# Altium PCB Switch.PcbDoc
Units mil, origin at the board's own origin, x right, y up, seen from the top; angles counter-clockwise.
Board outline 2390 x 2435 mil, 2 copper layers (Top Layer, Bottom Layer); 52 components, 35 nets, 139 pads, 12 vias.
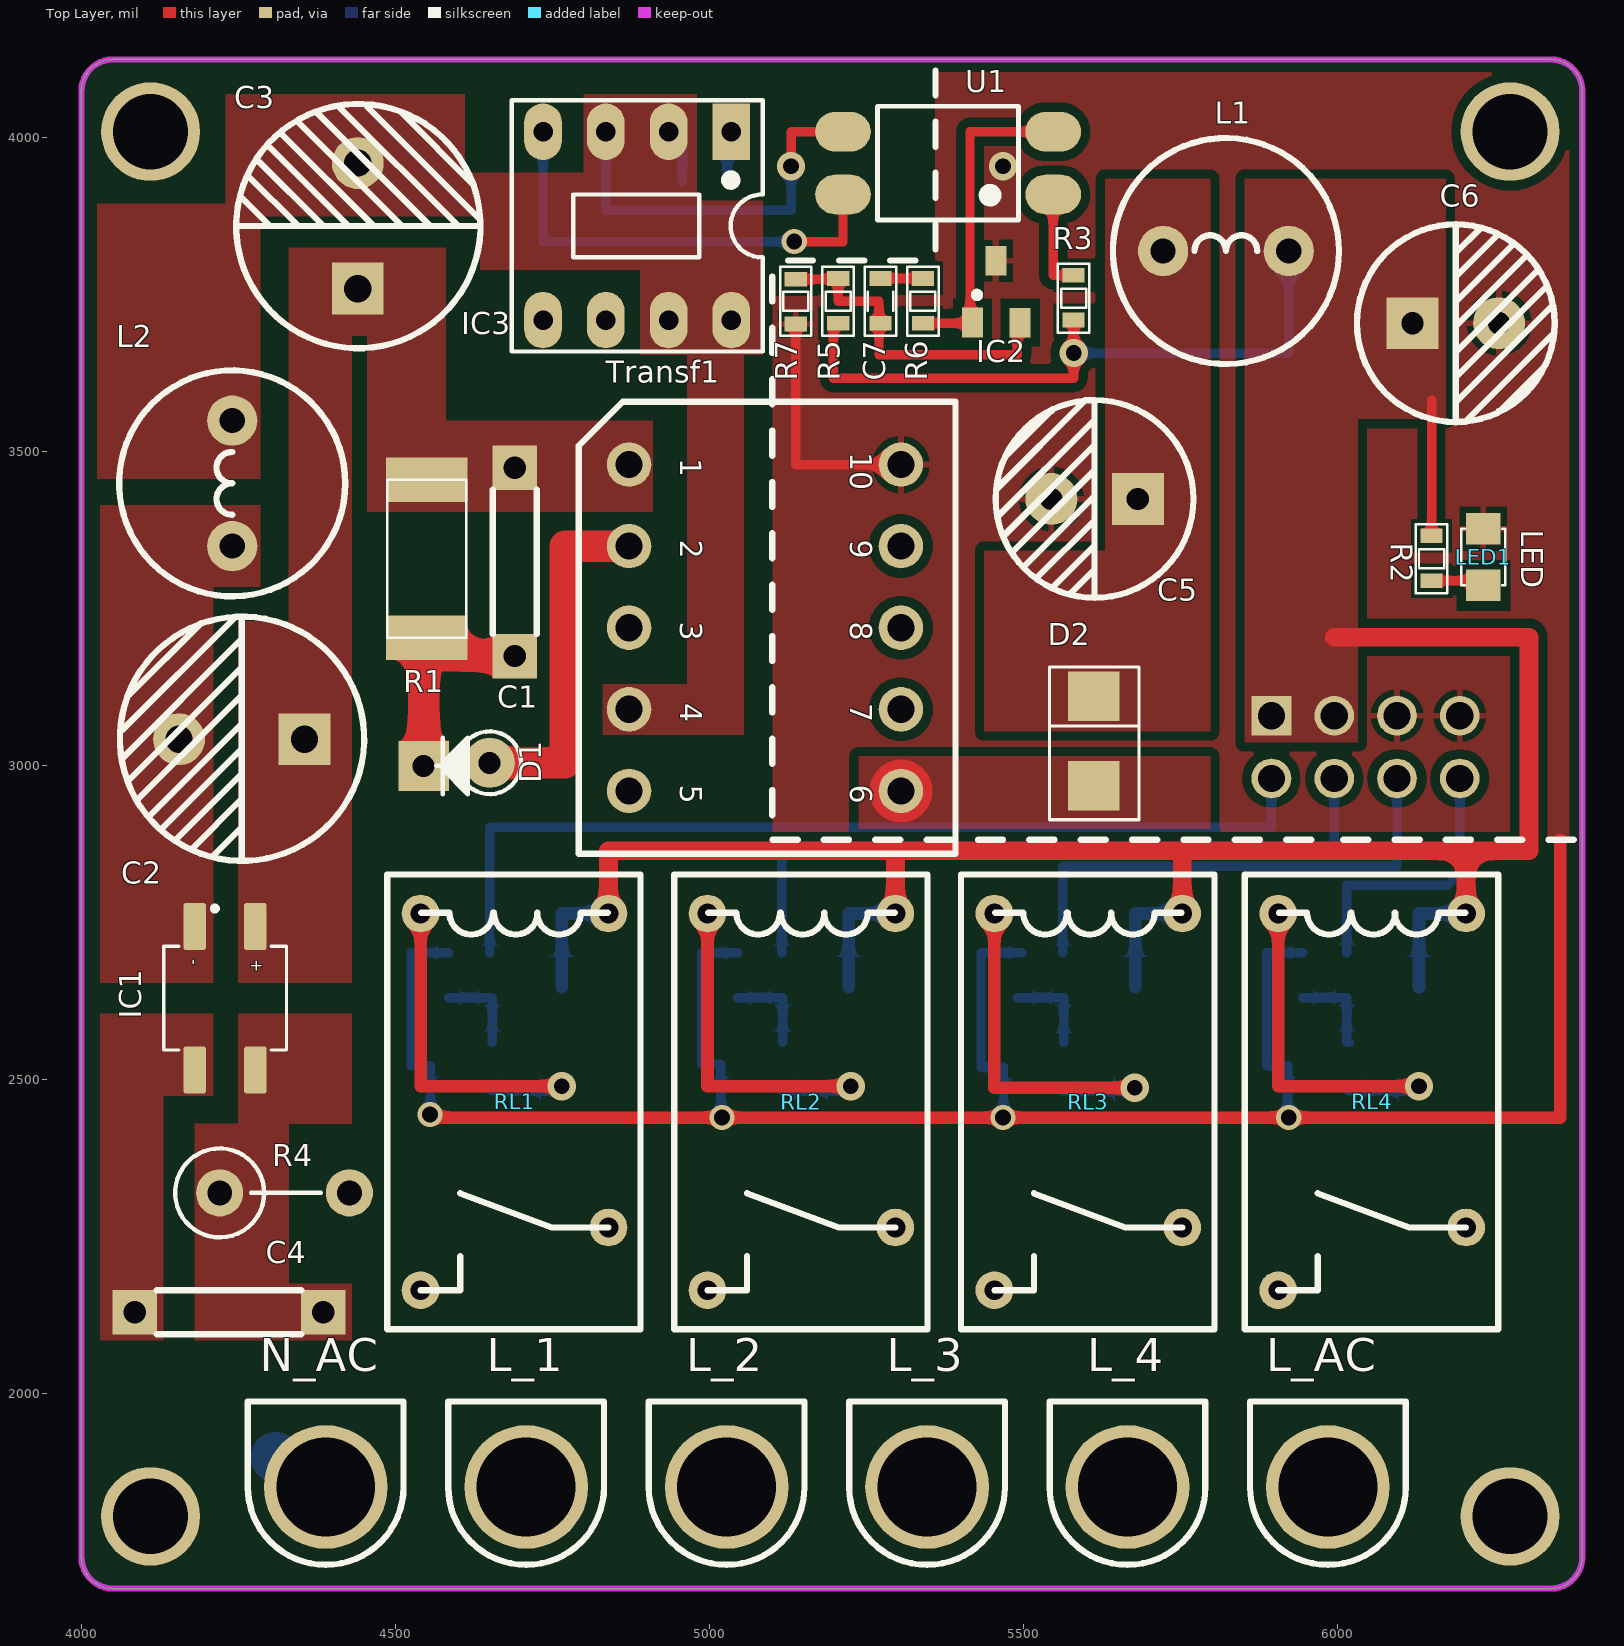
[diagram p0: Top Layer view]
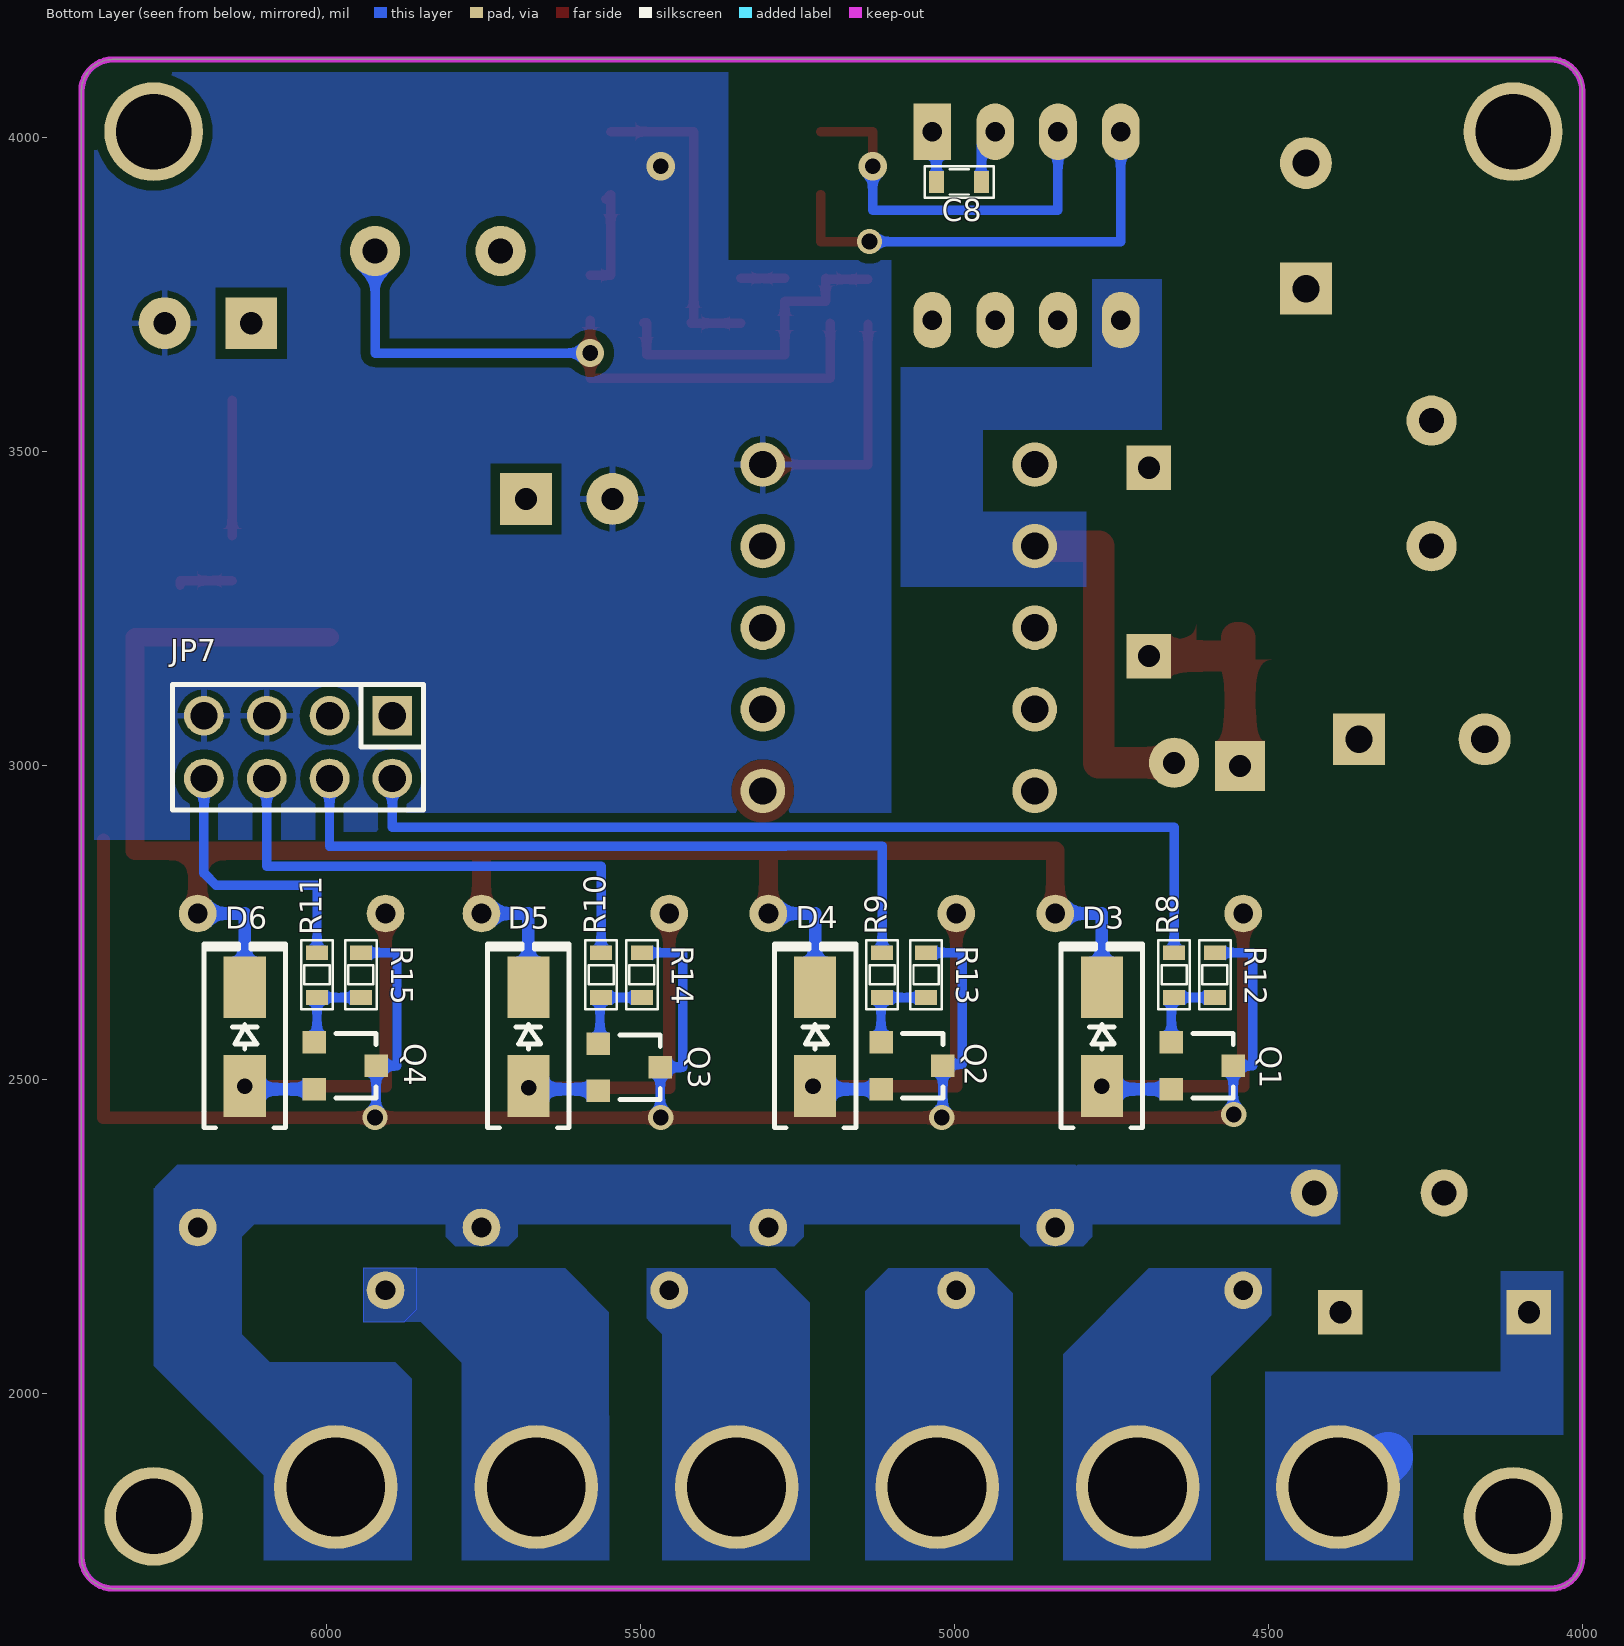
[diagram p1: Bottom Layer view, seen from below]
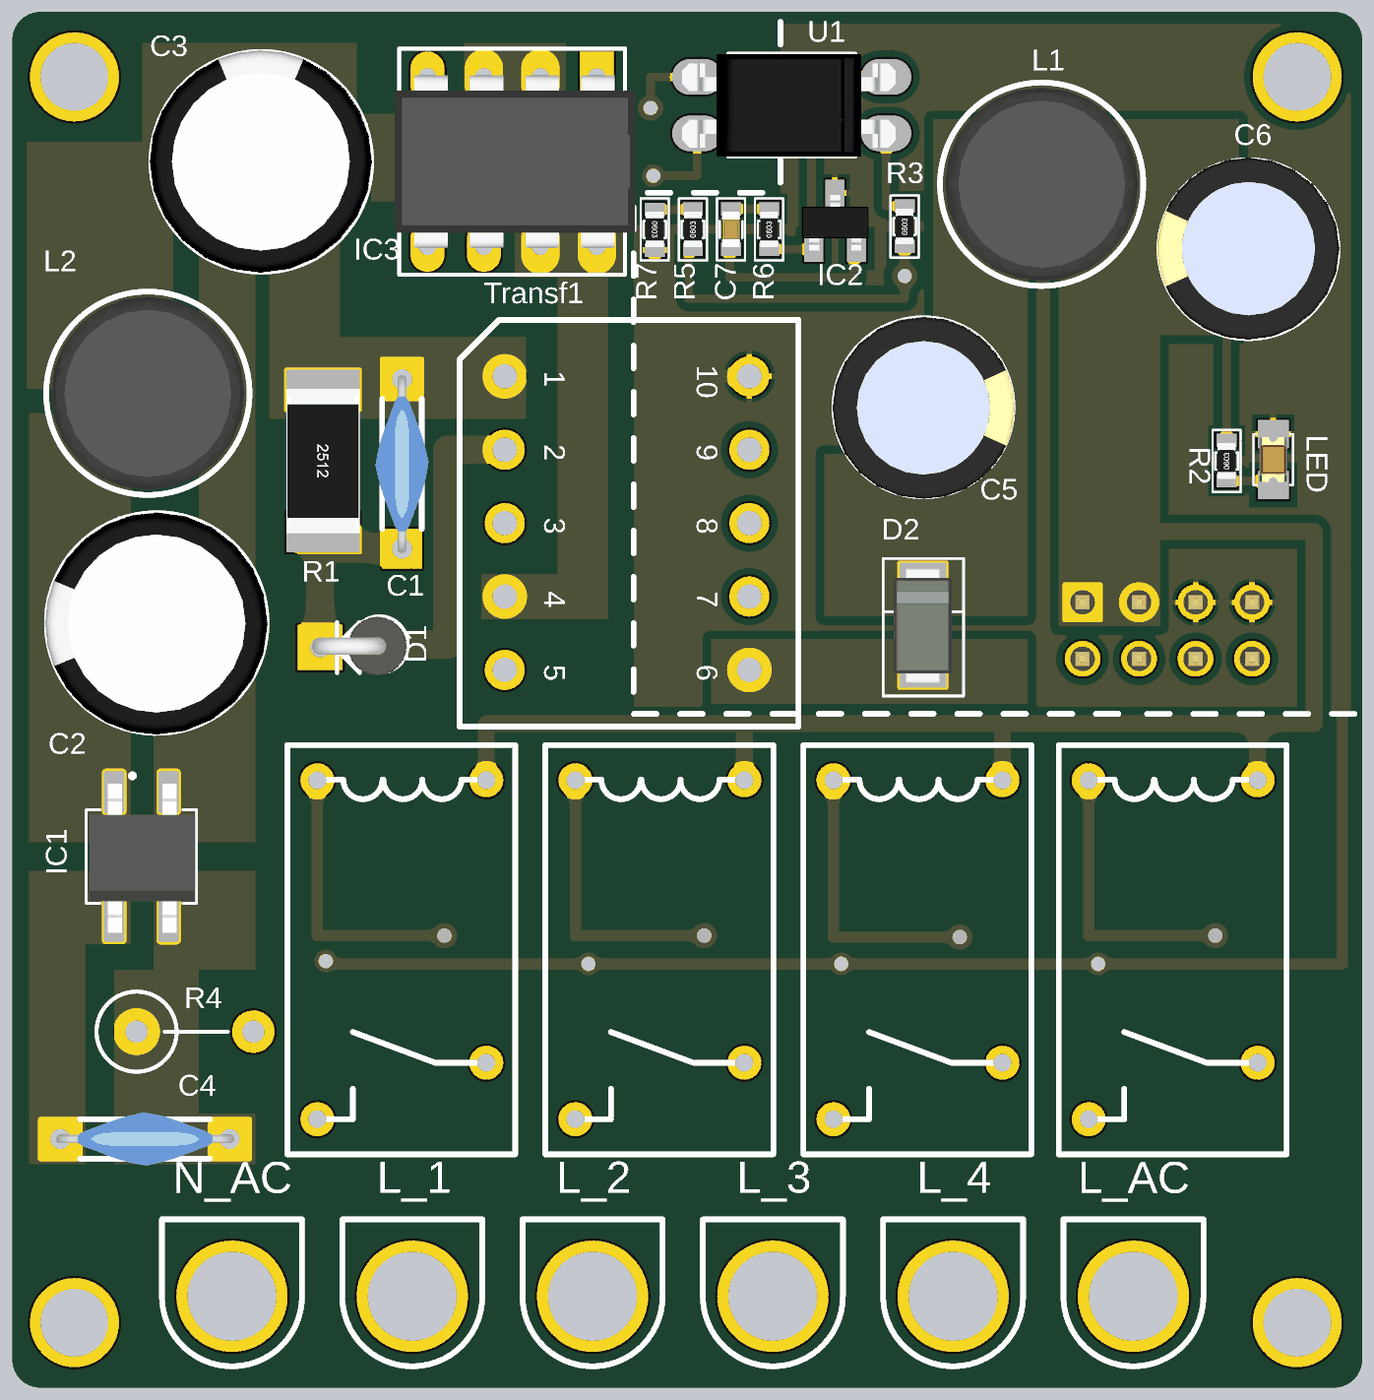
[diagram p2: 3D render of the assembled board from above, using the file's embedded part models]
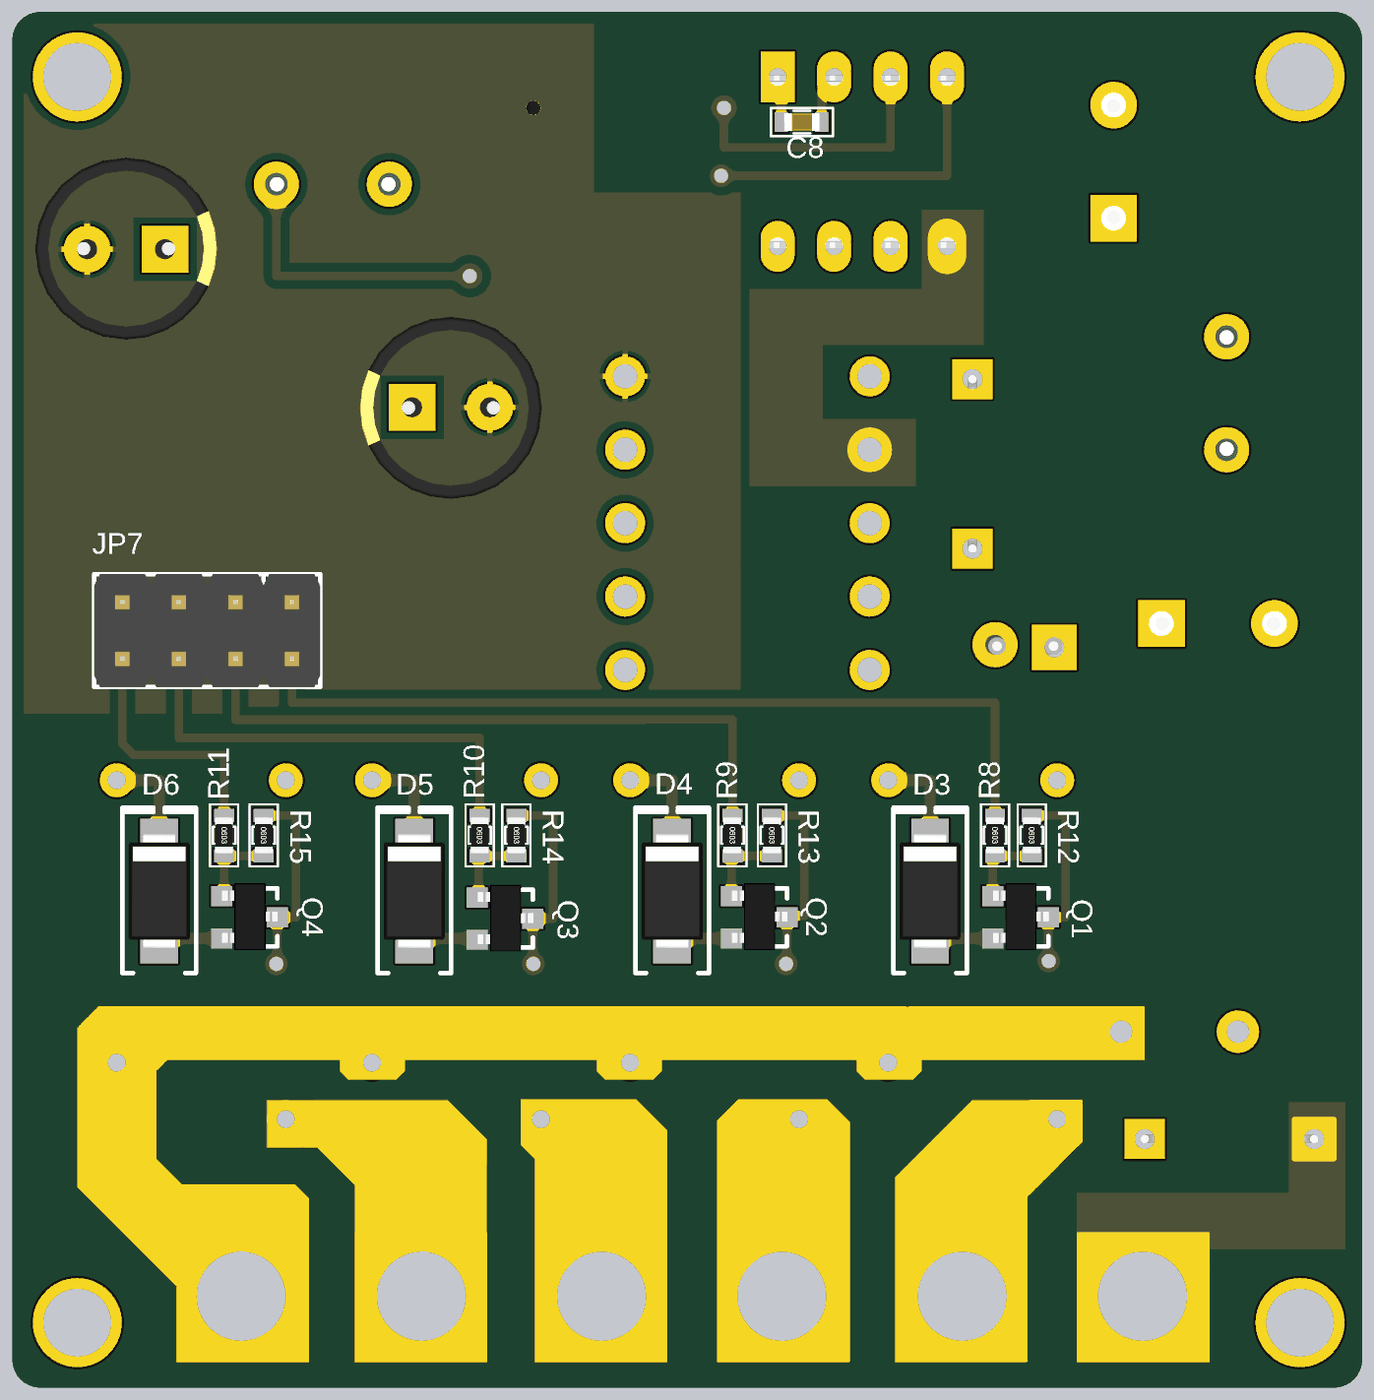
[diagram p3: 3D render of the assembled board from below, using the file's embedded part models]

## Layer stack, top to bottom
Top Solder: solder mask 0.4, Solder Resist, Dk 3.5
Top Layer: signal copper 1.4
Dielectric 1: dielectric 12.6, FR-4, Dk 4.8
Bottom Layer: signal copper 1.4
Bottom Solder: solder mask 0.4, Solder Resist, Dk 3.5

## Board outline
4000,1740 4000,4075 cw(c4050,4075) 4050,4125 6340,4125 cw(c6340,4075) 6390,4075 6390,1740 cw(c6340,1740) 6340,1690 4050,1690 cw(c4050,1740)

## Design rules (kind name [scope] priority, off if disabled: settings)
Clearance Clearance_1 [InNet('GND')] p1: gap=15 ignorepadtopadclearanceinfootprint=FALSE
Clearance AC_Clearance [InNetClass('AC')] p2: gap=20 ignorepadtopadclearanceinfootprint=FALSE
Clearance [All] p3: gap=15 ignorepadtopadclearanceinfootprint=FALSE
PolygonConnect AC_Polygon [InNetClass('AC')] p1: connectstyle=Direct reliefconductorwidth=10 reliefentries=4 polygonreliefangle="90 Angle" airgapwidth=10
PolygonConnect GND_Polaygon [InNet('GND')] p2: thpad.connectstyle=Relief thpad.reliefconductorwidth=10 thpad.reliefentries=4 thpad.polygonreliefangle="90 Angle" thpad.airgapwidth=10 smdpad.connectstyle=Relief smdpad.reliefconductorwidth=10 smdpad.reliefentries=4 smdpad.polygonreliefangle="90 Angle" smdpad.airgapwidth=10 via.connectstyle=Direct via.reliefconductorwidth=10 via.reliefentries=4 via.polygonreliefangle="90 Angle" via.airgapwidth=10
PolygonConnect [All] p3: thpad.connectstyle=Relief thpad.reliefconductorwidth=10 thpad.reliefentries=4 thpad.polygonreliefangle="90 Angle" thpad.airgapwidth=10 smdpad.connectstyle=Relief smdpad.reliefconductorwidth=10 smdpad.reliefentries=4 smdpad.polygonreliefangle="90 Angle" smdpad.airgapwidth=10 via.connectstyle=Direct via.reliefconductorwidth=10 via.reliefentries=4 via.polygonreliefangle="90 Angle" via.airgapwidth=10
RoutingVias [All] p1: holewidth=28 width=50 viastyle="Through Hole" minholewidth=15 minwidth=15 maxholewidth=100 maxwidth=100
SilkToSilkClearance [All] p1: silktosilkclearance=0
SilkToSolderMaskClearance [IsPad] p1: minsilkscreentomaskgap=0 clearancetoexposedcopper=TRUE
SolderMaskExpansion [All] p1: expansion=4 istentingtop=FALSE
UnRoutedNet [All] p1: checkbadconnections=TRUE
Width [All] p1: maxlimit=200 minlimit=10 preferedwidth=10
27 further rules are at their usual default settings.

## Classes and differential pairs
net class AC: L_1 L_2 L_3 L_4 L_AC N_AC

## Components (designator, comment, footprint, x,y, rotation, side; value= is the part's Value field where it differs from the comment)
C1 "1nF/400V" 103/2KV 4690,3475 r270 top
C2 "10uF/400V" C10mm 4255,3040 r180 top
C3 "10uF/400V" C10mm 4437.56,3860.35 r90 top
C4 "20D471K" 103/2KV 4085,2130 r0 top
C5 "470uF/25V" C8mm 5620,3422.5 r180 top
C6 "470uF/25V" C8mm 6181.96,3707.7 r0 top
C7 "100nF" CAP_0603 5272.5,3738.03 r90 top value=33p
C8 "100nF" CAP_0603 4990,3930 r0 bottom value=33p
D1 "1N4937" DIO-1AN 4595,3000 r0 top value=1N5007
D2 "SS14" DO-214AC(SMA) 5615,3017.5 r270 top value=1N5007
D3 "M7" "DIODE SMA" 4765,2568.76 r90 bottom
D4 "M7" "DIODE SMA" 5221.67,2568.76 r90 bottom
D5 "M7" "DIODE SMA" 5678.33,2568.76 r90 bottom
D6 "M7" "DIODE SMA" 6130,2568.76 r90 bottom
IC1 "MB6S" MB6S 4240,2635 r270 top
IC2 "TL431" TL431_SOT 5460,3765 r0 top
IC3 "TNY264" DIP8 4890,3860 r180 top
JP7 "JP 2x4 2.54" "JP 2x4 DT" 6045,3030 r0 bottom
L1 "22uH" Inductor 5822.5,3820 r0 top value="150 mH"
L2 "L-DIP-1" Inductor 4240,3450 r90 top value="150 mH"
L_1 "Coc_dong" Coc_dong 4704.21,1850 r180 top (schematic designator JP1)
L_2 "Coc_dong" Coc_dong 5023.43,1850 r180 top (schematic designator JP4)
L_3 "Coc_dong" Coc_dong 5342.64,1850 r180 top (schematic designator JP5)
L_4 "Coc_dong" Coc_dong 5661.85,1850 r180 top (schematic designator JP6)
L_AC "Coc_dong" Coc_dong 5981.06,1850 r180 top (schematic designator JP2)
LED1 "LED" LED-0805-Red 6232.5,3287.5 r90 top value="LED 3 ly Single Colour"
N_AC "Coc_dong" Coc_dong 4385,1850 r180 top (schematic designator JP3)
Q1 "2N2222" SOT23 4605,2522.5 r270 bottom value=C9014
Q2 "2N2222" SOT23 5067.5,2522.5 r270 bottom value=C9014
Q3 "2N2222" SOT23 5517.5,2520 r270 bottom value=C9014
Q4 "2N2222" SOT23 5970,2522.5 r270 bottom value=C9014
R1 "82k" RES-SMD-2512 4545,3330 r270 top
R2 "3.3k" RES-SMD-0603 6150,3330 r90 top
R3 "500R" RES-SMD-0603 5580,3745 r90 top
R4 "2R/2W" RES-1WW 4285,2320 r0 top
R5 "10k" RES-SMD-0603 5205,3740 r90 top
R6 "3.3k" RES-SMD-0603 5340,3740 r90 top
R7 "2.7k" RES-SMD-0603 5137.5,3740 r270 top
R8 "1k" RES-SMD-0603 4650,2667.5 r270 bottom
R9 "1k" RES-SMD-0603 5115,2667.5 r270 bottom
R10 "1k" RES-SMD-0603 5562.5,2667.5 r270 bottom
R11 "1k" RES-SMD-0603 6015,2667.5 r270 bottom
R12 "10k" RES-SMD-0603 4585,2667.5 r270 bottom
R13 "10k" RES-SMD-0603 5045,2667.5 r270 bottom
R14 "10k" RES-SMD-0603 5497.5,2667.5 r270 bottom
R15 "10k" RES-SMD-0603 5945,2667.5 r270 bottom
RL1 "Relay_HF32" HF32F 4890.39,2827.2 r270 top
RL2 "Relay_HF32" HF32F 5347.32,2827.2 r270 top
RL3 "Relay_HF32" HF32F 5804.25,2827.2 r270 top
RL4 "Relay_HF32" HF32F 6256.18,2827.2 r270 top
Transf1 "Transformer EE16" "Transformer SW" 4871.93,3479.92 r270 top
U1 "OPTO PC817 SMD" SOP4 5380,3960 r180 top value=PC817

## Footprints (in the part's own frame and the unit in brackets; to place one, negate y for a bottom-side part, rotate by r counter-clockwise, add the part's x,y. Pads: shape width x height; smd on the part's side, far side on the other; paste and mask are expansions set on the pad)
103/2KV [mm]
  rect 1.8x1.8 hole 0.9: 1(0,0) 2(7.62,0)
  silkscreen extent 0.89,-0.89 6.73,0.89, body extent -0.19,-1.2 7.81,1.19, height 9.03
C8mm [mm]
  rect 2.1x2.1 hole 0.9: 1(-1.581,-0.069)
  round 2.1 hole 0.9: 2(1.919,-0.069)
  silkscreen extent -3.83,-4.07 4.17,3.93, body extent -3.93,-4.14 4.27,4.06, height 13.81
C10mm [mm]
  rect 2.1x2.1 hole 1.1: 1(-2.549,-0.062)
  round 2.1 hole 1.1: 2(2.531,-0.062)
  silkscreen extent -4.96,-5.02 4.92,4.85, body extent -5.01,-5.06 4.96,4.94, height 20.01
CAP_0603 [mm]
  rect 0.6x0.9 smd: 1(-0.839,0) 2(0.977,0)
  silkscreen extent -1.35,-0.64 1.45,0.64, body extent -0.75,-0.4 0.85,0.4, height 0.9
Coc_dong [mm]
  round 5 hole 4: 1(-0.1,-0.042)
  silkscreen extent -3.25,-3.5 3.05,3.11
DIO-1AN [mil] "Diode 1A, W 100mil, L 150mil"
  round 80 hole 35: 1(55,5)
  rect 80x80 hole 35: 2(-50,0)
  silkscreen extent -30,-45 105,55, body extent -64,-50 104,55, height 252
"DIODE SMA" [mm] "SMA"
  rect 2.5x1.7 smd: 1(-2,0) 2(2,0)
  silkscreen extent -3.68,-1.65 3.75,1.65, body extent -2.6,-1.37 2.6,1.37, height 2.4
DIP8 [mil] "DIP, 8-Leads, Row Spacing 7.62mm, Pitch 2.54mm, Body 9.91x6.73mm"
  rect 60x90 hole 31: 1(-145,-150)
  oval 60x90 hole 31: 2(-45,-150) 3(55,-150) 4(155,-150) 5(155,150) 6(55,150) 7(-45,150) 8(-145,150)
  silkscreen extent -195,-200 205,200, body extent -213,-153 213,153, height 177
DO-214AC(SMA) [mm] "DO-214AC Diode Smallest Size"
  rect 2x2.1 smd: 1(1.245,-0.076) 2(-2.367,-0.076)
  silkscreen extent -3.56,-1.86 2.62,1.76, body extent -3.13,-1.38 2.07,1.22, height 2.4
HF32F [mm]
  round 1.524 hole 0.8: 1(16.82,-8.9) 2(14.28,-1.3) 4(1.58,-8.9) 5(1.58,-1.3)
  silkscreen extent 0,-10.25 18.4,0
Inductor [mil]
  round 80 hole 40: 1(-100,0) 2(100,0)
  silkscreen extent -180,-180 180,180, body extent -171,-171 171,171, height 394
"JP 2x4 DT" [mm]
  rect 1.61x1.6 hole 1.1: 1(-3.81,-1.27)
  oval 1.61x1.6 hole 1.1: 2(-1.27,-1.27) 3(1.27,-1.27) 4(3.81,-1.27) 5(3.81,1.27) 6(1.27,1.27) 7(-1.27,1.27) 8(-3.81,1.27)
  silkscreen extent -5.08,-2.54 5.08,2.54, body extent -5.08,-2.54 5.08,2.54, height 8.55
LED-0805-Red [mil]
  rect 50x55 smd: 1(0,0) 2(90,0)
  silkscreen extent 0,-35 90,35, body extent 5,-25 85,25, height 43
MB6S [mm]
  rrect23% 1.91x0.91 smd: 1(-2.774,0.935) 2(-2.774,-1.515) 3(3.026,-1.515) 4(3.026,0.935)
  silkscreen extent -3.6,-2.77 2.23,2.19, body extent -3.15,-2.61 3.55,2.11, height 2.7
RES-1WW [mm]
  round 1.905 hole 1: 1(-1.651,0) 2(3.6,0)
  silkscreen extent -3.45,-1.8 2.45,1.8
RES-SMD-0603 [mm]
  rect 0.6x0.9 smd: 1(-0.889,0) 2(0.927,0)
  silkscreen extent -1.4,-0.64 1.4,0.63, body extent -0.8,-0.4 0.8,0.4, height 0.43
RES-SMD-2512 [mm] "Chip Capacitor, Body 3.2x2.5mm, IPC Medium Density"
  rect 1.8x3.3 smd: 1(-3.2,0.127) 2(3.2,0.127)
  silkscreen extent -3.2,-1.47 3.2,1.73, body extent -3.2,-1.47 3.2,1.73, height 0.6
SOP4 [mm]
  oval 2.25x1.6 smd: 1(-4.25,1.27) 2(-4.25,-1.27) 3(4.25,-1.27) 4(4.25,1.27)
  silkscreen extent -2.85,-2.3 2.85,2.3, body extent -4.67,-2.29 4.93,2.31, height 3.6
SOT23 [mm] "SOT23"
  rect 0.9x0.95 smd: 1(-0.95,-1.25) 2(0,1.25)
  rect 0.9x0.95 smd mask+0: 3(0.95,-1.25)
  silkscreen extent -1.3,-0.38 1.3,1.25, body extent -1.52,-1.23 1.48,1.27, height 1.06
TL431_SOT [mm]
  rect 0.85x1.2 smd: 1(0.885,-1.5) 2(-0.095,1) 3(-1.04,-1.495)
  silkscreen extent -0.98,-0.5 -0.73,-0.25, body extent -1.57,-1.58 1.43,0.92, height 1.06
"Transformer SW" [mm] "Transformer; 4 Leads"
  round 1.8 hole 1.1: 1(0,0) 2(3.3,0) 3(6.6,0) 4(9.9,0) 5(13.2,0) 6(13.2,11) 7(9.9,11) 8(6.6,11) 9(3.3,11) 10(0,11)
  silkscreen extent -2.54,-2.03 15.75,13.21

## Part data
C1: library part Cap2KV, "CAP CERAMIC", LatestRevisionDate=17-Jul-2002, LatestRevisionNote="Re-released for DXP Platform.", PackageReference=RAD-0.3, Published=8-Jun-2000, Publisher="Altium Limited"
C2 C3: library part "Cap Pol", "Polarized Capacitor (Axial)", LatestRevisionDate=17-Jul-2002, LatestRevisionNote="Re-released for DXP Platform.", PackageReference=POLAR0.8, Published=8-Jun-2000, Publisher="Altium Limited"
C4: library part Cap2KV, "Varistor", LatestRevisionDate=17-Jul-2002, LatestRevisionNote="Re-released for DXP Platform.", PackageReference=RAD-0.3, Published=8-Jun-2000, Publisher="Altium Limited"
C5 C6: library part "Cap Pol", "470uF 25V 8x12mm", LatestRevisionDate=17-Jul-2002, LatestRevisionNote="Re-released for DXP Platform.", PackageReference=POLAR0.8, Published=8-Jun-2000, Publisher="Altium Limited"
C7 C8: library part CapSMD, "Capacitor", LatestRevisionDate=17-Jul-2002, LatestRevisionNote="Re-released for DXP Platform.", PackageReference=RAD-0.3, Published=8-Jun-2000, Publisher="Altium Limited"
D1: library part "Diode SMD", "Diode Schottky / 1N4937", Code - JEDEC=DO-214-AB, Published=8-Jun-2000, Publisher="Altium Limited", Revision="July-2002: Re-released for DXP Platform."
D2: library part "Diode SMD", "SS34 Diode Schottky 3A 40V SMA(DO-214AC)", Code - JEDEC=DO-214-AB, Published=8-Jun-2000, Publisher="Altium Limited", Revision="July-2002: Re-released for DXP Platform."
D3 D4 D5 D6: library part "Diode M7 ( 4007 )", "Dán", Chung_Loai=Dán, Don_Vi=Con, Ma_Hang=MH000944, Ten_Linh_Kien="Diode M7 1N4007 SMD 1A 1000V"
IC2: "Programmable Shunt Regulator"
IC3: "Enhanced, Energy Efficient, Low Power Off-line Switcher"
JP7: library part "JP 2x4 2.54 Duc Thang", "Cắm", Chung_Loai=Cắm, Don_Vi=Con, Ma_Hang=MH002686, Ten_Linh_Kien="Jump Đôi Đực 2.54MM 2x40P Thẳng 11MM"
L1: library part Inductor, "CD73R 22uH 1.23A 7345"
L2: "Inductor"
LED1: "LED Single colour Green and Red"
Q1 Q2 Q3 Q4: library part "C1815 HF SMD", "NPN transistor"
R1 R2 R3 R4 R5 R6 R7 R8 R9 R10 R11 R12 R13 R14 R15: library part "Resistor - SMD", "Resistor", Manufacturer="Generic Components", Class=Passive, Published=08/06/2000, Publisher="Altium Hobart Technology Centre"
Transf1: library part "Tranformer EE16"
U1: "Single Opto"

## Free pads (board coordinates)
  round 157.48 hole 120: 0(4110,1805) 0(4110,4010) 0(6275,1805) 0(6275,4010)

## Via types
v1: diameter 45, hole 25, Top Layer to Bottom Layer, tented both sides, 7 vias
v2: diameter 40, hole 25, Top Layer to Bottom Layer, tented both sides, 5 vias

## Nets (pads, with @x,y where several pads share a name; then routed paths per layer and width w, separated by ;. In a path a pad name is that pad's centre, name@x,y a point inside that pad or via, vN(x,y) a via of type N, cw(c..) or ccw(c..) an arc to the next point about the centre after c; other vN are vias at no path point)
+12: C6.1 D3.2 D4.2 D5.2 D6.2 JP7.1 JP7.2 L1.2 R2.2 R3.1 R5.1 RL1.5 RL2.5 RL3.5 RL4.5 | length 4567.7
  Top Layer w15: R5.1@5197.5,3705 5197.5,3617.5 5580,3617.5 v1(5580,3657.5) R3.1 ; R2.2 6150,3582.5
  Top Layer w20: 5295.86,2865 5296.14,2865 ; 5752.5,2865 5753.07,2865
  Top Layer w30: RL1.5 4839.21,2865 5295.86,2865 ; RL2.5 5296.14,2865 5752.5,2865 ; RL3.5 5753.07,2865 6205,2865 ; 5995,3205 6305,3205 6305,2865 6205,2865 ; RL4.5 6205,2865
  Bottom Layer w15: v1(5580,3657.5) 5922.5,3657.5 L1.2
  Bottom Layer w20: D3.2 4765,2765 RL1.5 ; D4.2 5221.67,2765 RL2.5 ; D5.2 5678.33,2765 RL3.5 ; D6.2 6130,2765 RL4.5
GND: C5.2 C6.2 IC2.2 JP7.3 JP7.4 LED1.2 Q1.2 Q2.2 Q3.2 Q4.2 R7.2 R12.1 R13.1 R14.1 R15.1 Transf1.10 | length 4065.5
  Top Layer w15: R7.2 5137.5,3479.92 Transf1.10 ; v1@5466.74,3955.54 5467.5,3955.54 v1(5467.5,3955)
  Top Layer w20: v2(4555,2445) 4555,2440 v2(5020,2440) v2(5467.5,2440) v2(5922.5,2440) 6355,2440 6355,2882.5 ; JP7.4@6205,3080 JP7.4@6205,3085
  Bottom Layer w15: v2(4555,2445) 4555.79,2445 Q1.2 4525,2522.5 4525,2702.5 R12.1 ; v2(5020,2440) 5018.29,2440 Q2.2 5018.29,2525 4987.5,2525 4987.5,2702.5 R13.1 ; v2(5467.5,2440) 5468.29,2440 Q3.2 5432.5,2520 5432.5,2702.5 R14.1 ; v2(5922.5,2440) 5920.79,2440 Q4.2 5887.5,2522.5 5887.5,2702.5 R15.1
GND_IN: C3.2 C8.1 IC3.2 IC3.3 IC3.7 IC3.8 L2.2 Transf1.4 U1.3 | length 716.8
  Top Layer w15: v1(5130,3955) 5130,4010 U1.3
  Bottom Layer w15: IC3.3 4835,3885 5130,3885 v1(5130,3955) ; IC3.2 4956.97,3988.03 C8.1
L_1: L_1.1 RL1.1
L_2: L_2.1 RL2.1
L_3: L_3.1 RL3.1
L_4: L_4.1 RL4.1
L_AC: L_AC.1 R4.2 RL1.2 RL2.2 RL3.2 RL4.2
N_AC: C4.1 IC1.3 N_AC.1 | length 102.8
  Bottom Layer w80: N_AC.1@4309.37,1899.6 4334.96,1874.01 N_AC.1@4401.58,1874.01
NetC1_1: C1.1 C2.1 C3.1 IC1.1 R1.1 Transf1.1
NetC1_2: C1.2 D1.2 R1.2 | length 378
  Top Layer w50: D1.2 4545,3204.01 R1.2 4550,3175 C1.2
NetC2_2: C2.2 IC1.2 L2.1
NetC4_2: C4.2 IC1.4 R4.1
NetC5_1: C5.1 D2.2 L1.1
NetC7_1: C7.1 IC2.1 R5.2 R7.1 | length 529.8
  Top Layer w15: R7.1 R5.2@5205,3775 ; R5.2 R5.2@5205,3775 ; IC2.1 5490,3705.94 5490,3655 5270,3655 5270,3740 5205,3740 R5.2@5205,3775
NetC7_2: C7.2 R6.2 | length 70
  Top Layer w15: C7.2@5270,3776.49 R6.2
NetC8_2: C8.2 IC3.1 | length 82.7
  Bottom Layer w15: C8.2 5028.46,4003.46 IC3.1
NetD1_1: D1.1 IC3.5 Transf1.2 | length 566.9
  Top Layer w50: D1.1 4770,3005 4770,3350 Transf1.2
NetD2_1: D2.1 Transf1.6 | length 0.3
  Top Layer w100: Transf1.6 Transf1.6@5305.24,2960
NetD3_1: D3.1 Q1.3 RL1.4 | length 620.7
  Top Layer w20: RL1.4 4540,2490 v1(4765,2490) v1@4765,2487.5
  Bottom Layer w20: RL1.4 RL1.4@4542.5,2765 ; Q1.3 4765,2485.1 v1(4765,2490)
NetD4_1: D4.1 Q2.3 RL2.4 | length 616.3
  Top Layer w20: RL2.4 4996.93,2490 v1(5225,2490)
  Bottom Layer w20: Q2.3 5225,2485.1 v1(5225,2490)
NetD5_1: D5.1 Q3.3 RL3.4 | length 616.8
  Top Layer w20: RL3.4 5453.86,2487.5 v1(5677.5,2487.5)
  Bottom Layer w20: Q3.3@5564.21,2485.1 5677.5,2485.1 v1(5677.5,2487.5)
NetD6_1: D6.1 Q4.3 RL4.4 | length 614.9
  Top Layer w20: RL4.4 5905.79,2490 v1(6130,2490)
  Bottom Layer w20: Q4.3 6130,2485.1 v1(6130,2490)
NetIC2_3: IC2.3 R6.1 U1.2 | length 520.5
  Top Layer w15: R6.1 5419.06,3705 IC2.3 5415,3706.16 5415,4010 U1.2
NetIC3_4: IC3.4 U1.4 | length 727.7
  Top Layer w15: v2(5135,3835) 5212.68,3835 U1.4
  Bottom Layer w15: IC3.4 4735,3835 v2(5135,3835)
NetLED1_1: LED1.1 R2.1 | length 90
  Top Layer w15: R2.1 6232.5,3295 LED1.1
NetQ1_1: Q1.1 R8.2 R12.2 | length 140.3
  Bottom Layer w15: R12.2 R8.2 4654.21,2631.01 Q1.1
NetQ2_1: Q2.1 R9.2 R13.2 | length 142.8
  Bottom Layer w15: R13.2 R9.2 5116.71,2631.01 Q2.1
NetQ3_1: Q3.1 R10.2 R14.2 | length 145.3
  Bottom Layer w15: R14.2@5490,2631.01 5555,2631.01 5564.21,2631.01 Q3.1@5564.21,2559.9
NetQ4_1: Q4.1 R11.2 R15.2 | length 145.3
  Bottom Layer w15: R15.2 R11.2 6015,2559.9 Q4.1
NetR3_2: R3.2 U1.1 | length 172
  Top Layer w15: U1.1@5555,3902.32 U1.1 5547.32,3781.49 R3.2
RL1: JP7.8 R8.1 | length 1522.9
  Bottom Layer w15: R8.1 4650,2902.5 4847.74,2902.5 4847.93,2902.3 5064.27,2902.3 5064.47,2902.5 5280.81,2902.5 5281,2902.3 5895,2902.3 JP7.8
RL2: JP7.7 R9.1 | length 1157.8
  Bottom Layer w15: R9.1 5115,2872.5 5268.38,2872.5 5268.58,2872.3 5995,2872.3 JP7.7
RL3: JP7.6 R10.1 | length 810
  Bottom Layer w15: R10.1 5562.5,2840 6095,2840 JP7.6
RL4: JP7.5 R11.1 | length 446.2
  Bottom Layer w15: R11.1 6015,2810 6175.75,2810 6195,2829.25 JP7.5
pads on no net: IC3.6 Transf1.3 Transf1.5 Transf1.7 Transf1.8 Transf1.9

## Polygon pours and split planes (outlines as drawn)
L_AC on Bottom Layer "100" (solid, pour order 113): 4780,2270 4385,2270 4385,2365 4807.57,2365
L_AC on Bottom Layer "100" (solid, pour order 112): 5864.37,1908.25 5864.37,2024.37 5890,2050 6240.63,2050
L_AC on Bottom Layer "100" (solid, pour order 111): 5695,2280.41 5695,2250 5710,2235 5795,2235 5810,2250 5810,2280.41
L_AC on Bottom Layer "100" (solid, pour order 110): 5240,2275 5240,2250 5255,2235 5340,2235 5355,2250 5355,2275
L_AC on Bottom Layer "100" (solid, pour order 109): 4780,2275 4780,2250 4795,2235 4880,2235 4895,2250 4895,2275
L_AC on Bottom Layer "100" (solid, pour order 108): 6160.13,2224.87 6115,2270 6095,2270 6095,2365 6237.43,2365 6275,2327.43
L_AC on Bottom Layer "100" (solid, pour order 107): 6095,2365 4807.57,2365 4780,2337.43 4780,2270 6095,2270
L_AC on Bottom Layer "100" (solid, pour order 106): 6275,2202.43 6275,2045 6100,1870 6005,1965 6135,2095 6135,2202.43
L_AC on Bottom Layer "100" (solid, pour order 105): 5864.37,1965 6099.37,1965 6099.37,1735 5864.37,1735
L_AC on Bottom Layer "100" (solid, pour order 104): 6135,2327.43 6275,2327.43 6275,2202.43 6135,2202.43
no net on Bottom Layer "100" (solid, pour order 100): 5855.94,2199.89 5940.94,2199.89 5940.94,2114.89 5875.94,2114.89 5855.94,2134.89
L_1 on Bottom Layer "100" (solid, pour order 90): 4591.88,1965 4826.88,1965 4826.88,1735 4591.88,1735
N_AC on Bottom Layer "100" (solid, pour order 89): 4270,1965 4505,1965 4505,1735 4270,1735
GND on Bottom Layer "100" (solid, pour order 88): 5360,4125 5360,3805 5100.48,3805 5100.48,2882.4 6390,2882.4 6390,4075 ccw(c6340,4075) 6340,4125
NetD1_1 on Bottom Layer "100" (solid, pour order 79): 4780,3775 4780,3635 5085,3635 5085,3285 4790,3285 4790,3405 4955,3405 4955,3535 4670,3535 4670,3775
N_AC on Bottom Layer "100" (solid, pour order 53): 4505,2035 4130,2035 4130,2195 4030,2195 4030,1935 4505,1935
L_4 on Bottom Layer "100" (solid, pour order 41): 5940,2115 5850,2115 5784.37,2049.37 5784.37,1965 5549.37,1965 5550,1965.63 5550,2130 5620,2200 5855,2200
L_3 on Bottom Layer "100" (solid, pour order 40): 5485,2115 5465,2095 5465,2085 5465,1965 5230,1965 5230,2145 5285,2200 5429.75,2200
L_2 on Bottom Layer "100" (solid, pour order 39): 4906.88,1965 4906.88,2160 4946.88,2200 5105,2200 5141.88,2163.12 5141.88,1965
L_1 on Bottom Layer "100" (solid, pour order 37): 4560.25,2200 4690,2200 4826.88,2063.12 4826.88,1965 4591.88,1965 4591.88,2028.12 4505,2115
L_4 on Bottom Layer "100" (solid, pour order 35): 5855.94,2199.89 5940.94,2199.89 5940.94,2114.89 5875.94,2114.89 5855.94,2134.89
L_3 on Bottom Layer "100" (solid, pour order 34): 5400,2200 5490,2200 5490,2120 5485,2115 5420,2115 5400,2135
L_1 on Bottom Layer "100" (solid, pour order 33): 4495,2200 4590,2200 4590,2135 4570,2115 4505,2115 4495,2125
L_2 on Bottom Layer "100" (solid, pour order 32): 4945,2195 5050,2195 5050,2135 5030,2115 4965,2115 4945,2135
L_3 on Bottom Layer "100" (solid, pour order 7): 5230,1965 5465,1965 5465,1735 5230,1735
L_4 on Bottom Layer "100" (solid, pour order 8): 5549.37,1965 5784.37,1965 5784.37,1735 5549.37,1735
L_2 on Bottom Layer "100" (solid, pour order 6): 4906.88,1965 5141.88,1965 5141.88,1735 4906.88,1735
GND on Top Layer "100" (solid, pour order 87): 5360,4125 5360,3805 5100.48,3805 5100.48,2882.4 6390,2882.4 6390,4075 ccw(c6340,4075) 6340,4125
+12 on Top Layer "100" (solid, pour order 86): 5852.5,3557.5 5852.5,3037.5 6032.5,3037.5 6032.5,3557.5
+12 on Top Layer "100" (solid, pour order 85): 5852.5,3935 6172.5,3935 6172.5,3552.5 5852.5,3552.5
NetC5_1 on Top Layer "100" (solid, pour order 84): 5437.5,3055 5797.5,3055 5797.5,3935 5630,3935 5630,3342.5 5437.5,3342.5
NetD2_1 on Top Layer "100" (solid, pour order 83): 5237.5,3015 5237.5,2900 5797.5,2900 5797.5,3015
GND_IN on Top Layer "100" (solid, pour order 81): 4965,3655 4965,3130 4830,3130 4830,3050 5055,3050 5055,3655
GND_IN on Top Layer "100" (solid, pour order 77): 4890,3790 4635,3790 4635,3875 4890,3875
GND_IN on Top Layer "100" (solid, pour order 76): 4610,3875 4805,3875 4805,3945 4610,3945
GND_IN on Top Layer "100" (solid, pour order 75): 4800,4070 4800,3825 4890,3825 4890,3655 5085,3655 5085,3900 4980,3900 4980,4070
NetC1_1 on Top Layer "100" (solid, pour order 73): 4455,3685 4455,3405 4910,3405 4910,3550 4580,3550 4580,3685
NetC1_1 on Top Layer "100" (solid, pour order 72): 4250,3105 4250,3230 4330,3230 4330,3825 4580,3825 4580,3685 4430,3685 4430,3105
NetC1_1 on Top Layer "100" (solid, pour order 67): 4250,2655 4250,3105 4430,3105 4430,2655
GND_IN on Top Layer "100" (solid, pour order 65): 4610,4070 4610,3875 4285,3875 4285,3457.5 4025,3457.5 4025,3895 4230,3895 4230,4070
NetC4_2 on Top Layer "100" (solid, pour order 62): 4330,2430 4430,2430 4430,2605 4330,2605
NetC4_2 on Top Layer "100" (solid, pour order 61): 4330,2175 4430,2175 4430,2085 4330,2085
NetC2_2 on Top Layer "100" (solid, pour order 58): 4210,3415 4285,3415 4285,3285 4210,3285
NetC2_2 on Top Layer "100" (solid, pour order 55): 4210,2655 4210,3415 4030,3415 4030,2655
NetC4_2 on Top Layer "100" (solid, pour order 54): 4180,2085 4330,2085 4330,2445 4330,2605 4250,2605 4250,2430 4180,2430
N_AC on Top Layer "100" (solid, pour order 52): 4030,2175 4030,2605 4210,2605 4210,2475 4130,2475 4130,2175
N_AC on Top Layer "100" (solid, pour order 51): 4130,2085 4130,2175 4030,2175 4030,2085
L_AC on Bottom Solder "100" (solid, pour order 45): 5864.37,1908.25 5864.37,2024.37 5890,2050 6240.63,2050
L_AC on Bottom Solder "100" (solid, pour order 44): 5695,2280.41 5695,2250 5710,2235 5795,2235 5810,2250 5810,2280.41
L_AC on Bottom Solder "100" (solid, pour order 43): 5240,2275 5240,2250 5255,2235 5340,2235 5355,2250 5355,2275
L_AC on Bottom Solder "100" (solid, pour order 42): 4780,2275 4780,2250 4795,2235 4880,2235 4895,2250 4895,2275
L_AC on Bottom Solder "100" (solid, pour order 46): 4780,2270 4385,2270 4385,2365 4807.57,2365
L_AC on Bottom Solder "100" (solid, pour order 17): 6095,2365 4807.57,2365 4780,2337.43 4780,2270 6095,2270
L_AC on Bottom Solder "100" (solid, pour order 4): 6135,2327.43 6275,2327.43 6275,2202.43 6135,2202.43
L_AC on Bottom Solder "100" (solid, pour order 18): 6160.13,2224.87 6115,2270 6095,2270 6095,2365 6237.43,2365 6275,2327.43
L_AC on Bottom Solder "100" (solid, pour order 9): 5864.37,1965 6099.37,1965 6099.37,1735 5864.37,1735
L_AC on Bottom Solder "100" (solid, pour order 10): 6275,2202.43 6275,2045 6100,1870 6005,1965 6135,2095 6135,2202.43
L_4 on Bottom Solder "100" (solid, pour order 103): 5548.92,1964.22 5783.92,1964.22 5783.92,1734.22 5548.92,1734.22
L_4 on Bottom Solder "100" (solid, pour order 102): 5853.92,2198.59 5938.92,2198.59 5938.92,2113.59 5873.92,2113.59 5853.92,2133.59
L_4 on Bottom Solder "100" (solid, pour order 101): 5938.92,2113.59 5848.92,2113.59 5783.3,2047.97 5783.3,1963.59 5548.3,1963.59 5548.92,1964.22 5548.92,2128.59 5618.92,2198.59 5853.92,2198.59
L_3 on Bottom Solder "100" (solid, pour order 98): 5400,2200 5490,2200 5490,2120 5485,2115 5420,2115 5400,2135
L_3 on Bottom Solder "100" (solid, pour order 99): 5485,2115 5465,2095 5465,2085 5465,1965 5230,1965 5230,2145 5285,2200 5429.75,2200
L_2 on Bottom Solder "100" (solid, pour order 97): 4906.88,1965 4906.88,2160 4946.88,2200 5105,2200 5141.88,2163.12 5141.88,1965
L_1 on Bottom Solder "100" (solid, pour order 95): 4494.08,2199.35 4589.08,2199.35 4589.08,2134.35 4569.08,2114.35 4504.08,2114.35 4494.08,2124.35
L_1 on Bottom Solder "100" (solid, pour order 96): 4560.87,2198.44 4690.62,2198.44 4827.5,2061.56 4827.5,1963.44 4592.5,1963.44 4592.5,2026.56 4505.62,2113.44
L_3 on Bottom Solder "100" (solid, pour order 92): 5230,1965 5465,1965 5465,1735 5230,1735
L_2 on Bottom Solder "100" (solid, pour order 91): 4906.88,1965 5141.88,1965 5141.88,1735 4906.88,1735
L_1 on Bottom Solder "100" (solid, pour order 5): 4592.5,1963.44 4827.5,1963.44 4827.5,1733.44 4592.5,1733.44
N_AC on Bottom Solder "100" (solid, pour order 0): 4270,1965 4505,1965 4505,1735 4270,1735

## Keep-outs
Keep-Out Layer:
  lines w10: 4000,1740 ccw(c4050,1740) 4050,1690 6340,1690 ccw(c6340,1740) 6390,1740 6390,4075 ccw(c6340,4075) 6340,4125 4240,4125 4050,4125 ccw(c4050,4075) 4000,4075 4000,1740

## Silkscreen, mask and mechanical layers (free items; w line width, h text height)
Top Overlay:
  lines w10: 5100,2921.51 5100,2961.51 ; 5100,3003.31 5100,3043.31 ; 5100,3085.11 5100,3125.11 ; 5100,3166.91 5100,3206.91 ; 5100,3248.71 5100,3288.71 ; 5100,3330.51 5100,3370.51 ; 5100,3412.31 5100,3452.31 ; 5100,3494.11 5100,3534.11 ; 5100,3575.92 5100,3615.92 ; 5100,3657.72 5100,3697.72 ; 5100,3739.52 5100,3779.52 ; 5100.48,2882.5 5140.48,2882.5 ; 5125,3805 5165,3805 ; 5182.28,2882.5 5222.28,2882.5 ; 5206.51,3805 5246.51,3805 ; 5264.08,2882.5 5304.08,2882.5 ; 5288.01,3805 5328.01,3805 ; 5345.89,2882.5 5385.89,2882.5 ; 5360,3822.98 5360,3862.98 ; 5360,3904.49 5360,3944.49 ; 5360,3985.99 5360,4025.99 ; 5360,4067.5 5360,4107.5 ; 5427.69,2882.5 5467.69,2882.5 ; 5509.49,2882.5 5549.49,2882.5 ; 5591.29,2882.5 5631.29,2882.5 ; 5673.09,2882.5 5713.09,2882.5 ; 5754.89,2882.5 5794.89,2882.5 ; 5836.69,2882.5 5876.69,2882.5 ; 5918.49,2882.5 5958.49,2882.5 ; 6009.21,2882.4 6049.21,2882.4 ; 6091.01,2882.4 6131.01,2882.4 ; 6172.81,2882.4 6212.81,2882.4 ; 6254.61,2882.4 6294.61,2882.4 ; 6336.42,2882.4 6376.42,2882.4

## Text inside footprints (layer, text, board x,y; h text height)
IC1: Top Overlay "+" at 4263.62,2692.09 h32.04 r270; Top Overlay "-" at 4165.2,2692.09 h32.06 r270
Transf1: Top Overlay "10" at 5211.93,3499.92 h60 r270; Top Overlay "9" at 5211.93,3359.92 h60 r270; Top Overlay "8" at 5211.93,3229.92 h60 r270; Top Overlay "7" at 5211.93,3099.92 h60 r270; Top Overlay "6" at 5211.93,2969.92 h60 r270; Top Overlay "5" at 4941.93,2969.92 h60 r270; Top Overlay "4" at 4941.93,3099.92 h60 r270; Top Overlay "3" at 4941.93,3229.92 h60 r270; Top Overlay "2" at 4941.93,3359.92 h60 r270; Top Overlay "1" at 4941.93,3489.92 h59.06 r270